# Altium PCB BRD-Bicycle-LED Brd.PcbDoc
Units mil, origin at the board's own origin, x right, y up, seen from the top; angles counter-clockwise.
Board outline 650 x 2000 mil, 2 copper layers (Top Layer, Bottom Layer), stack 63 mil thick; 5 components, 9 nets, 18 pads, 0 vias.
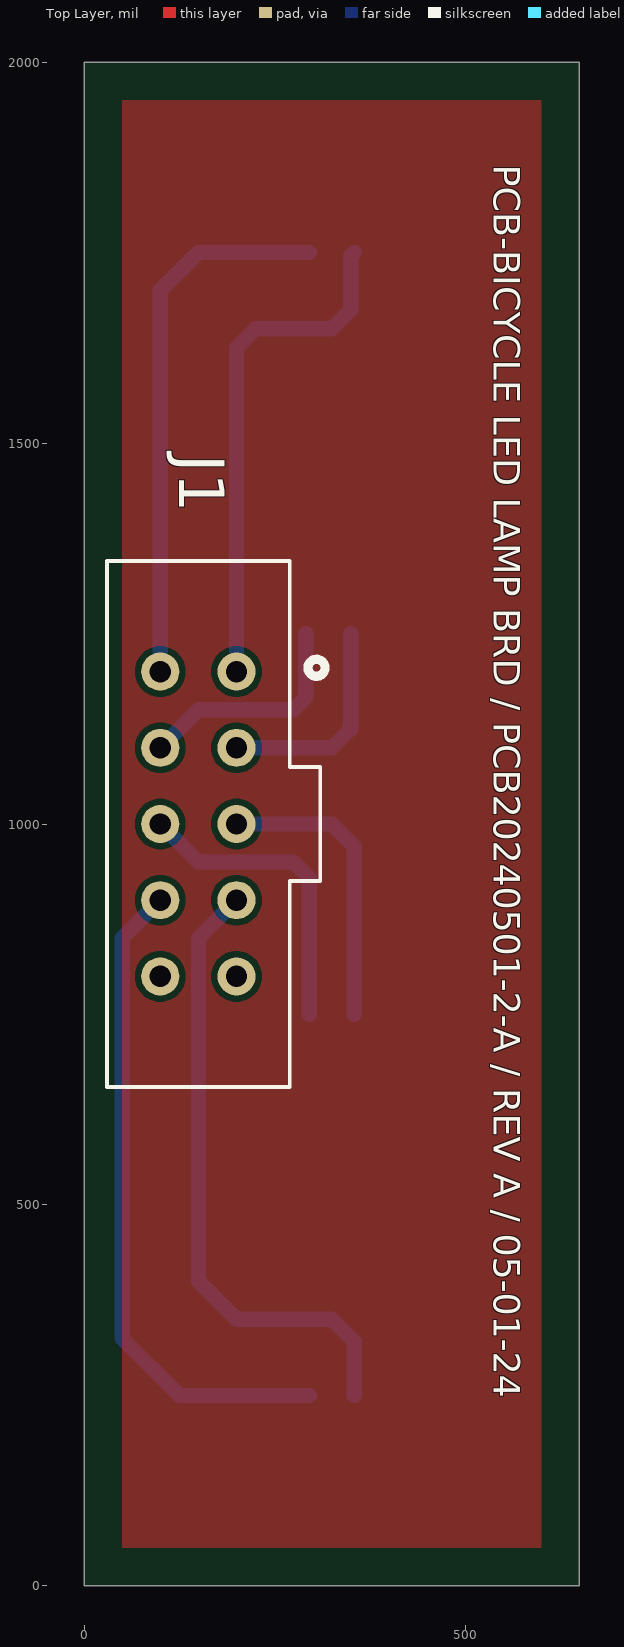
[diagram p0: Top Layer view]
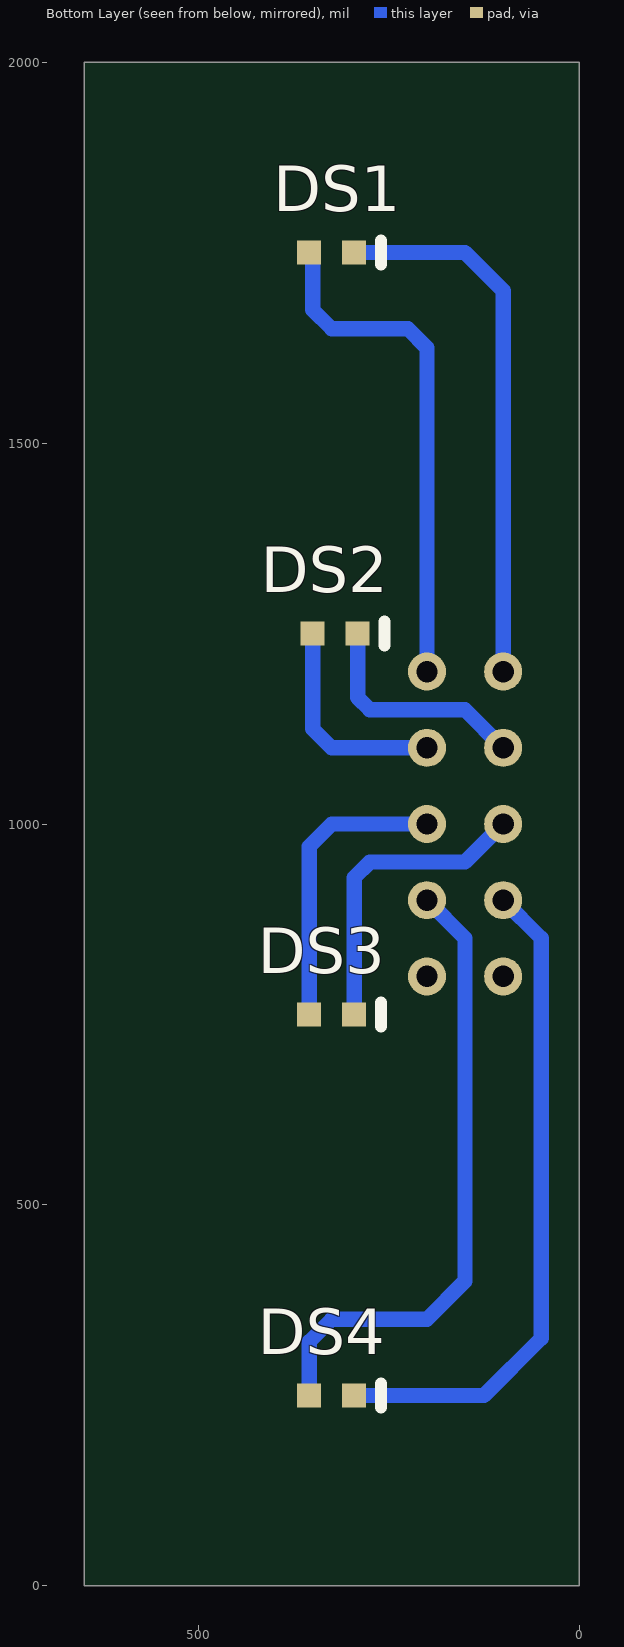
[diagram p1: Bottom Layer view, seen from below]

## Layer stack, top to bottom
Top Solder: solder mask 0.8, Solder Resist, Dk 3.5
Top Layer: signal copper 2
Dielectric 1: dielectric 59, FR-4, Dk 4.8
Bottom Layer: signal copper 2
Bottom Solder: solder mask 0.8, Solder Resist, Dk 3.5

## Board outline
0,0 0,2000 650,2000 650,0

## Design rules (kind name [scope] priority, off if disabled: settings)
Clearance Clearance_1 [All] p1: gap=8 ignorepadtopadclearanceinfootprint=FALSE except(0: Arc-Hole Track-Hole SMDPad-Hole THPad-Hole Via-Hole Fill-Hole Poly-Hole Region-Hole Text-Hole Hole-Hole; 10: Via-Via Via-Fill Via-Poly Via-Region Fill-Fill Fill-Poly Fill-Region Poly-Poly Poly-Region Region-Region)
Clearance [All] p2: gap=10 ignorepadtopadclearanceinfootprint=FALSE ismatrix=TRUE
ComponentClearance [All] p1: gap=8 collisioncheckmode=3 verticalgap=8 showdistances=FALSE
HoleSize [All] p1: absolutevalues=TRUE maxlimit=150 minlimit=1 maxpercent=80.000 minpercent=20.000
HoleToHoleClearance [All] p1: gap=5 allowstackedmicrovias=TRUE
MinimumSolderMaskSliver [All] p1: minsoldermaskwidth=8
PlaneClearance [All] p1: clearance=12
PlaneConnect [All] p1: pad.planeconnectstyle=Direct pad.reliefexpansion=20 pad.reliefentries=4 pad.reliefconductorwidth=10 pad.reliefairgap=10 via.planeconnectstyle=Relief via.reliefexpansion=20 via.reliefentries=4 via.reliefconductorwidth=15 via.reliefairgap=8
PolygonConnect [All] p1: connectstyle=Relief reliefconductorwidth=10 reliefentries=4 polygonreliefangle="90 Angle" airgapwidth=10
RoutingVias [All] p1: holewidth=28 width=50 viastyle="Through Hole" minholewidth=28 minwidth=50 maxholewidth=28 maxwidth=50
SilkToSilkClearance [All] p1: silktosilkclearance=8
SilkToSolderMaskClearance [IsPad] p1: minsilkscreentomaskgap=8 clearancetoexposedcopper=TRUE
SolderMaskExpansion [All] p1: expansion=4 istentingtop=FALSE
SupplyNets "Schematic Supply Nets" [InNet('GND')] p1: voltage=0.000
Width [All] p1: maxlimit=10 minlimit=10 preferedwidth=10
22 further rules are at their usual default settings.

## Components (designator, comment, footprint, x,y, rotation, side; value= is the part's Value field where it differs from the comment)
DS1 "LTW-C191TS5" LTST-LTW-C191TS5_V 325,1750 r180 bottom
DS2 "LTW-C191TS5" LTST-LTW-C191TS5_V 320.47,1250 r180 bottom
DS3 "LTW-C191TS5" LTST-LTW-C191TS5_V 325,750 r180 bottom
DS4 "LTW-C191TS5" LTST-LTW-C191TS5_V 325,250 r180 bottom
J1 "SFH11-NBPC-D05-ST-BK" SFH11-NBPC-D05-ST-BK-Footprint-1 200,1200 r0 top

## Footprints (in the part's own frame and the unit in brackets; to place one, negate y for a bottom-side part, rotate by r counter-clockwise, add the part's x,y. Pads: shape width x height; smd on the part's side, far side on the other; paste and mask are expansions set on the pad)
LTST-LTW-C191TS5_V [mm] "SMD, 2-Leads, Body 1.6x0.8mm"
  rect 0.8x0.8 smd: 1(-0.75,0) 2(0.75,0)
  silkscreen extent 1.65,-0.4 1.65,0.4, body extent -0.8,-0.4 0.8,0.4, height 0.65
SFH11-NBPC-D05-ST-BK-Footprint-1 [mil]
  round 50 hole 28: 1(0,0) 2(-100,0) 3(0,-100) 4(-100,-100) 5(0,-200) 6(-100,-200) 7(0,-300) 8(-100,-300) 9(0,-400) 10(-100,-400)
  silkscreen extent -170,-545 110,145, body extent -168,-547 68,147, height 335

## Part data
DS1 DS2 DS3 DS4: library part CMP-007-00027-1, "LED Uni-Color White, 70 mW, 20 mA, -20 to 80 degC, 2-Pin SMD, RoHS, Tape and Reel", Case/Package=0603, Colour=White, Forward Current=5mA, Forward Voltage=3.15V, Manufacturer=Lite-On, Max Operating Temperature=80°C, Min Operating Temperature=-20°C, Package Description="2-Pin Surface Mount Device, Body 1.6 x 0.8 mm", Package Quantity=1, Power=70mW, Datasheet URL=http://optoelectronics.liteon.com/upload/download/DS22-2004-201/S_110_LTW-C191TS5.pdf, Datasheet Version="Rev. B, 06/2010", Illumination Colour=White, Lens Style=Diffused, Luminous Intensity=28mcd, Manufacturer URL=http://www.us.liteon.com/, Mounting Technology=SM, Nominal Vf=2.93V, Package Reference=LTW-C191TS5, Packaging=TapeandReel, Pins=2, RoHS Compliant=True, Viewing Angle=130degrees
J1: library part CMP-002-00256-2, "Conn Hdr 10POS 0.1 Gold Pcb", Dielectric Withstanding Voltage (AC)=500V, Max Operating Temperature=105°C, Min Operating Temperature=-40°C, Body Breadth=0.276inch, Body Depth=0.335inch, Body Length=0.7inch, Connector Type="BOARD CONNECTOR", Contact Finish - Mating=AU, Contact Finish - Termination=GOLD, Contact Gender=Female, Contact Pattern=RECTANGULAR, Contact Style="SQ PIN-SKT", Mating Contact Pitch=0.1inch, Mating Contact Row Spacing=0.1inch, Mounting Style=STRAIGHT, Mounting Technology=Board, Number of Contacts=10, Number Of PCB Rows=2, RoHS Compliant=Yes, System=Connector

## Nets (pads, with @x,y where several pads share a name; then routed paths per layer and width w, separated by ;. In a path a pad name is that pad's centre, name@x,y a point inside that pad or via, vN(x,y) a via of type N, cw(c..) or ccw(c..) an arc to the next point about the centre after c; other vN are vias at no path point)
GND: J1.9
NetDS1_1: DS1.1 J1.1 | length 672.6
  Bottom Layer w20: J1.1 200,1625 225,1650 325,1650 350,1675 350,1745.47 DS1.1
NetDS1_2: DS1.2 J1.2 | length 716.2
  Bottom Layer w20: J1.2 100,1700 150,1750 DS1.2
NetDS2_1: DS2.1 J1.3 | length 285.4
  Bottom Layer w20: J1.3 325,1100 350,1125 DS2.1
NetDS2_2: DS2.2 J1.4 | length 302.3
  Bottom Layer w20: J1.4 150,1150 275,1150 290.94,1165.94 DS2.2
NetDS3_1: DS3.1 J1.5 | length 387.2
  Bottom Layer w20: J1.5 325,1000 354.53,970.47 DS3.1
NetDS3_2: DS3.2 J1.6 | length 404.2
  Bottom Layer w20: J1.6 150,950 275,950 295.47,929.53 DS3.2
NetDS4_1: DS4.1 J1.7 | length 828.7
  Bottom Layer w20: J1.7 150,850 150,400 200,350 325,350 354.53,320.47 DS4.1
NetDS4_2: DS4.2 J1.8 | length 872.2
  Bottom Layer w20: J1.8 50,850 50,325 125,250 DS4.2
pads on no net: J1.10

## Polygon pours and split planes (outlines as drawn)
no net on Top Layer "NONET_L01_P000" (solid, pour order 0): 50,1950 600,1950 600,50 50,50

## Silkscreen, mask and mechanical layers (free items; w line width, h text height)
Top Overlay:
  circle w12: c305,1205 r11.18
  text "PCB-BICYCLE LED LAMP BRD / PCB20240501-2-A / REV A / 05-01-24" at 525.65,1865 h60 r270
Mechanical 1:
  the board outline again, w4